# Altium PCB PCB1_TimerCAR.PcbDoc
Units mm, origin at the board's own origin, x right, y up, seen from the top; angles counter-clockwise.
Board outline 42.55 x 34.8 mm, 2 copper layers (Top Layer, Bottom Layer); 27 components, 24 nets, 134 pads, 5 vias.
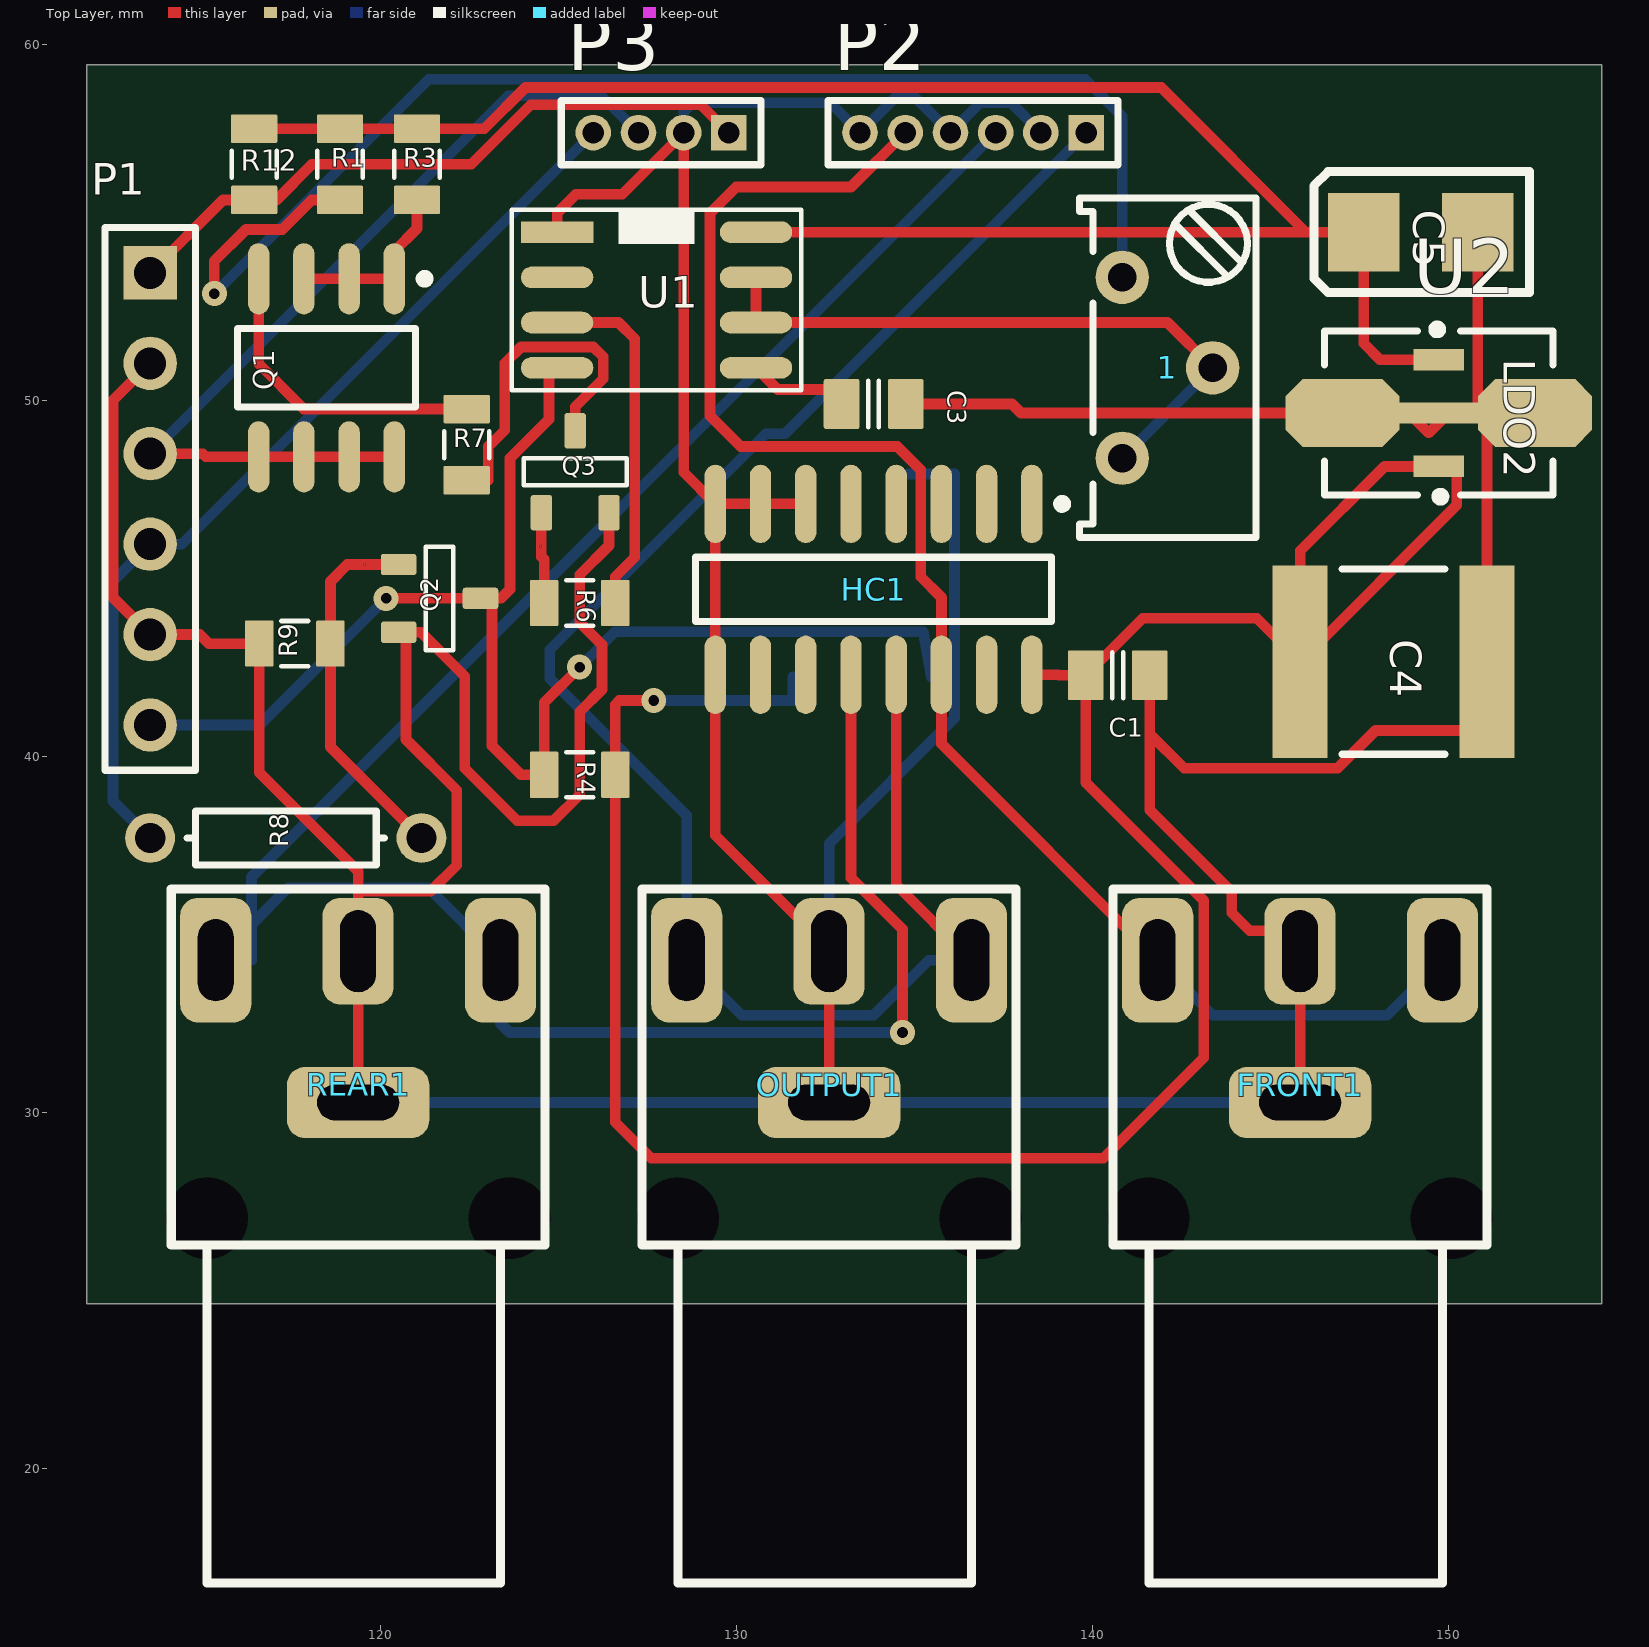
[diagram p0: Top Layer view]
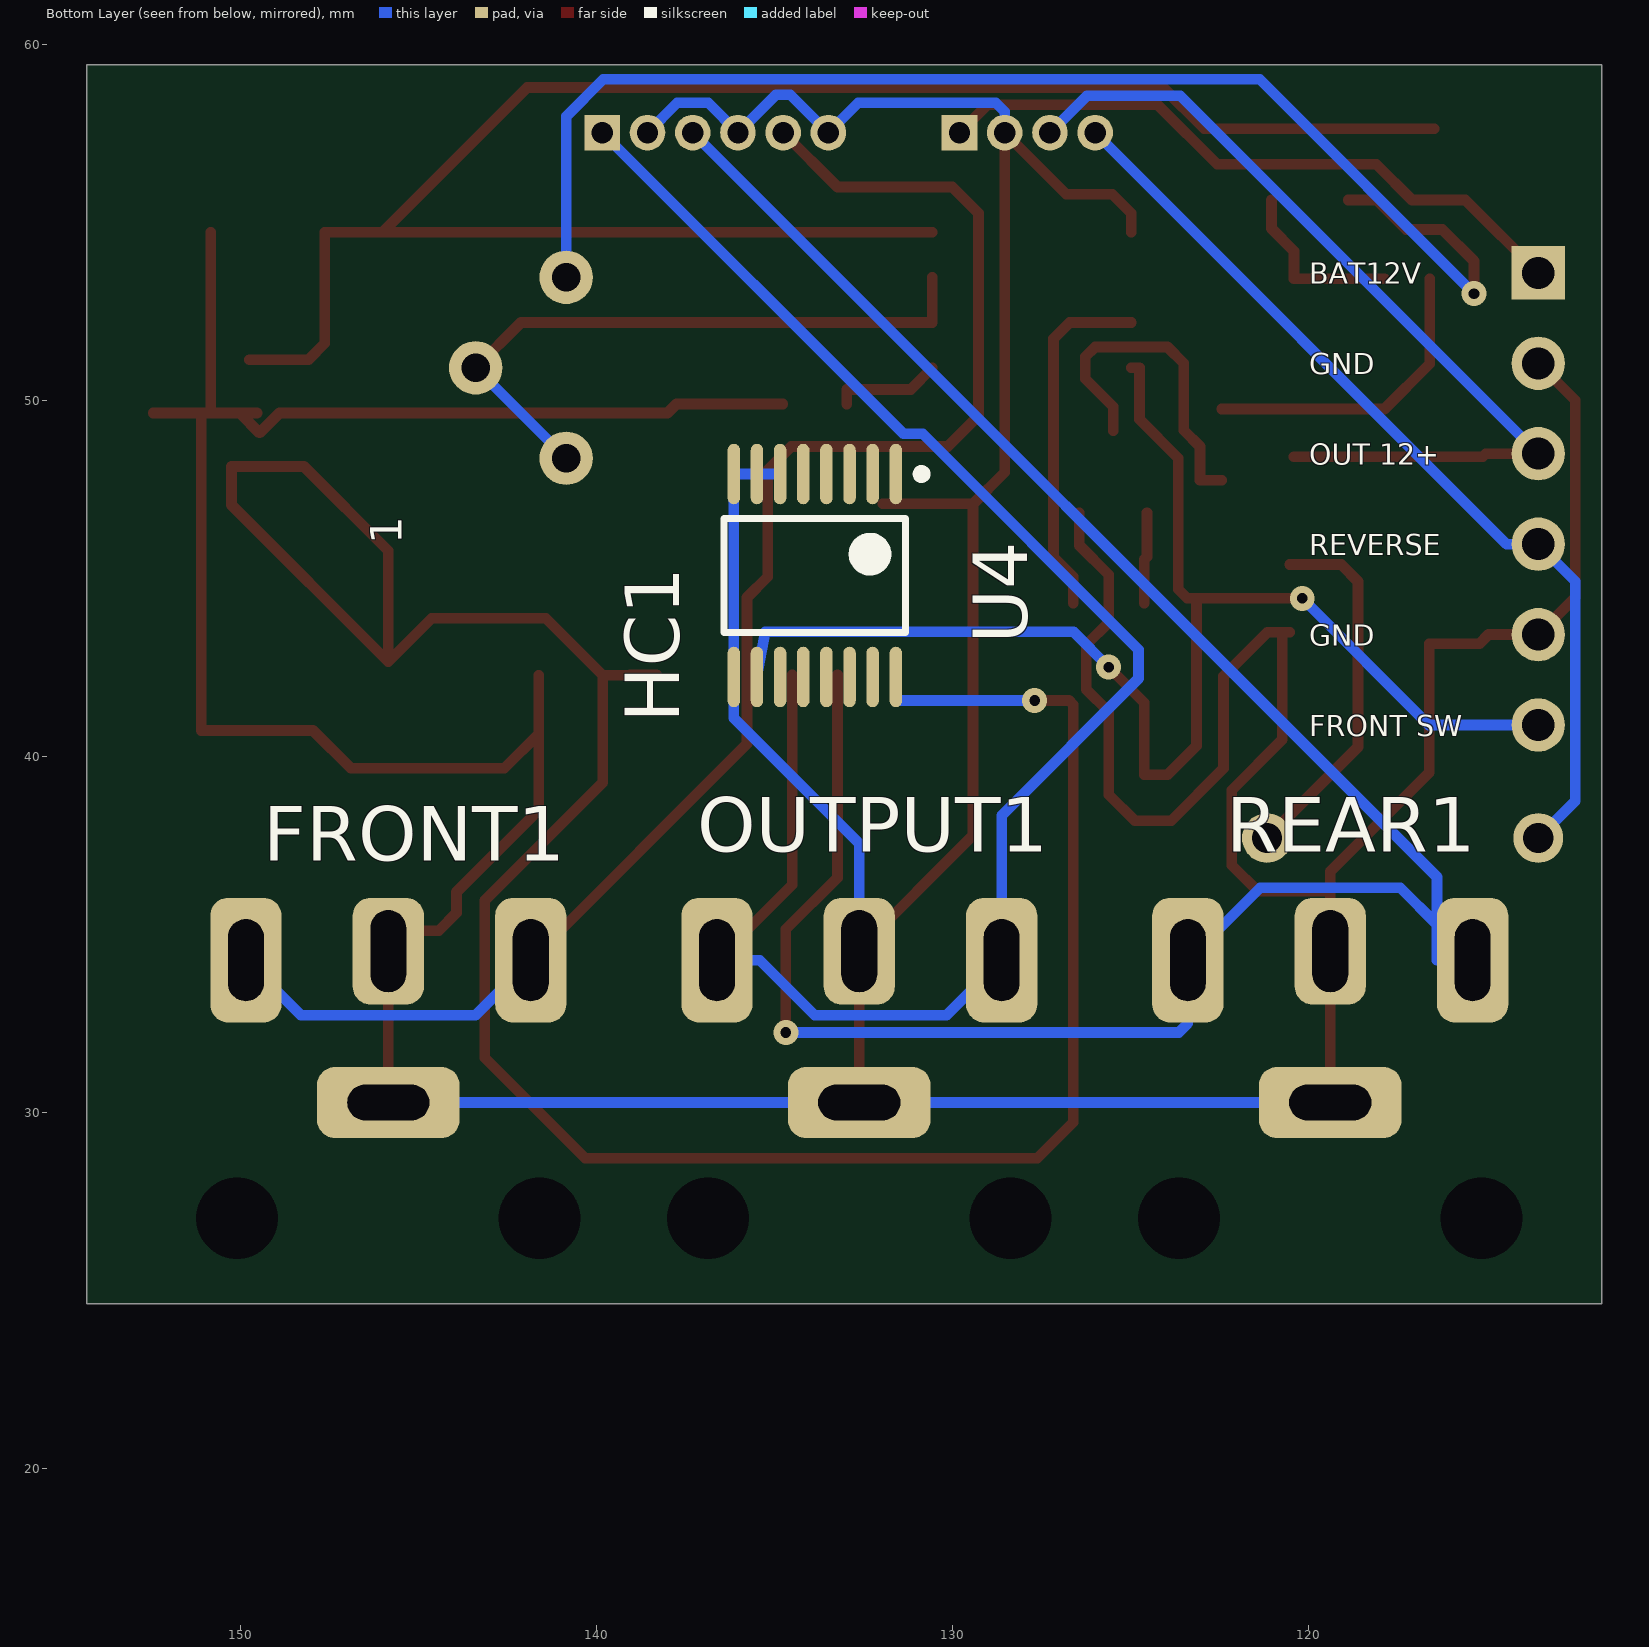
[diagram p1: Bottom Layer view, seen from below]
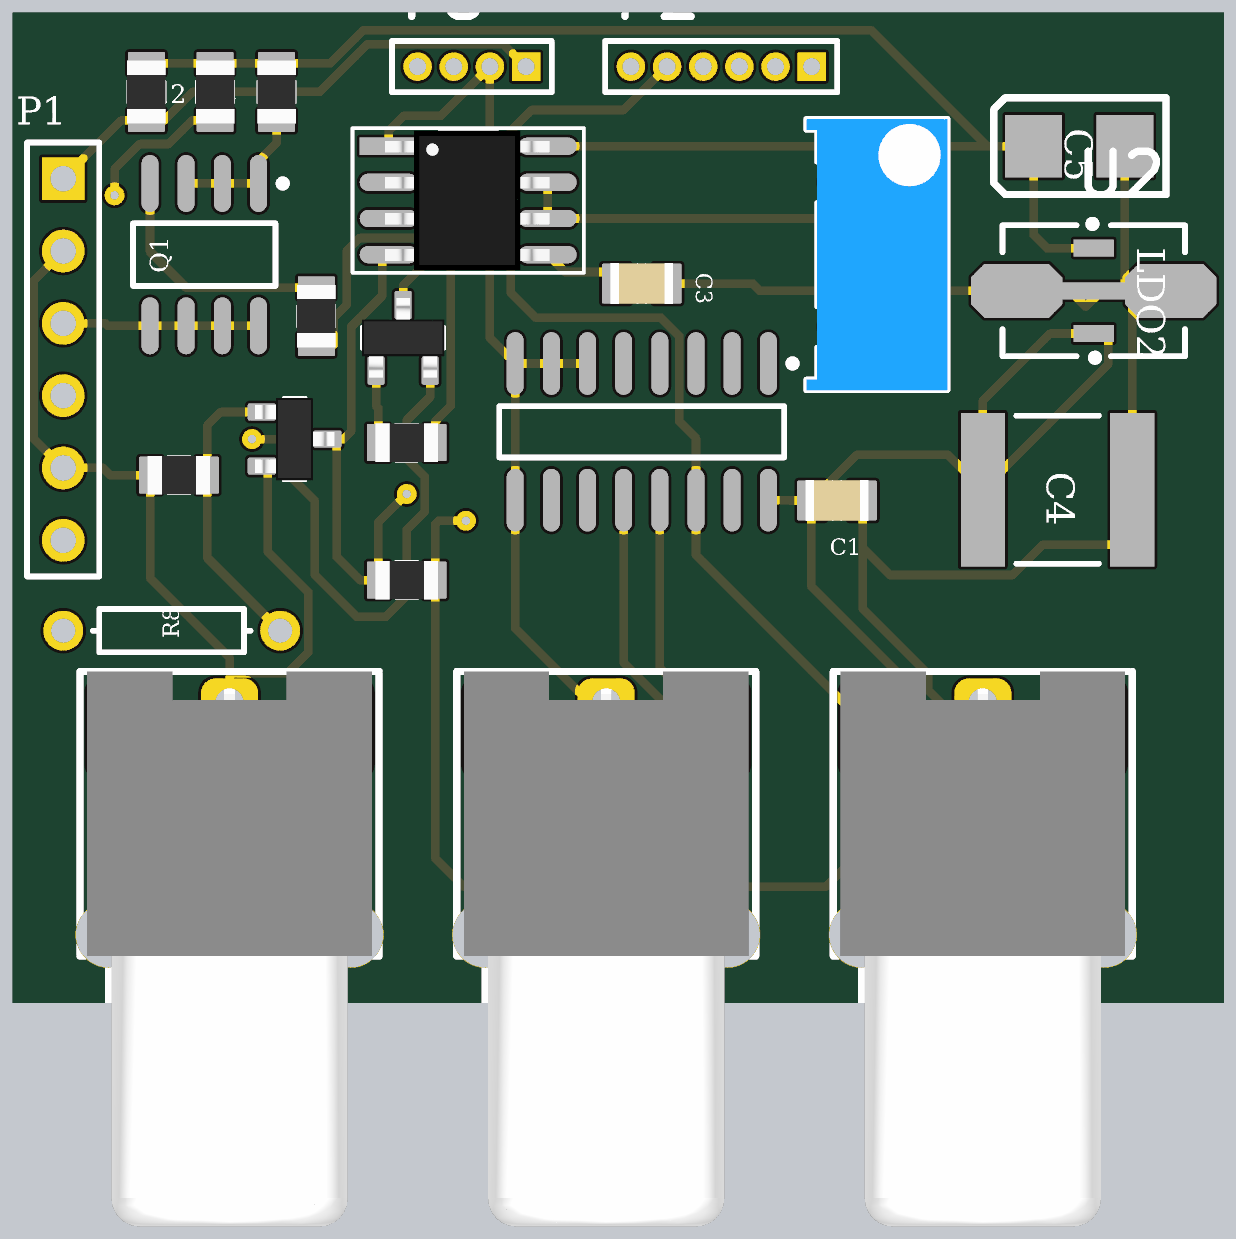
[diagram p2: 3D render of the assembled board from above, using the file's embedded part models]

## Layer stack, top to bottom
Top Solder: solder mask 0.0102, Solder Resist, Dk 3.5
Top Layer: signal copper 0.0356
Dielectric 1: dielectric 0.32, FR-4, Dk 4.8
Bottom Layer: signal copper 0.0356
Bottom Solder: solder mask 0.0102, Solder Resist, Dk 3.5

## Board outline
111.76,24.638 154.305,24.638 154.305,59.436 111.76,59.436

## Design rules (kind name [scope] priority, off if disabled: settings)
Clearance Clearance_polygon [InPolygon] p1: gap=0.3 ignorepadtopadclearanceinfootprint=FALSE except(0: Arc-Hole Track-Hole SMDPad-Hole THPad-Hole Via-Hole Fill-Hole Poly-Hole Region-Hole Text-Hole)
Clearance [All] p2: gap=0.127 ignorepadtopadclearanceinfootprint=FALSE except(0: Arc-Hole Track-Hole SMDPad-Hole THPad-Hole Via-Hole Fill-Hole Poly-Hole Region-Hole Text-Hole)
PolygonConnect [All] p1: connectstyle=Direct reliefconductorwidth=0.254 reliefentries=4 polygonreliefangle="45 Angle" airgapwidth=0.254
RoutingVias [All] p1: holewidth=0.3 width=0.7 viastyle="Through Hole" minholewidth=0.3 minwidth=0.6 maxholewidth=0.5 maxwidth=1
SolderMaskExpansion [All] p1: expansion=0.102
Width Width_Logo [InUnion(1) or InUnion(1048577) or InUnion(3)] p1: maxlimit=2 minlimit=0.001 preferedwidth=0.254
Width Width_Power [InNetClass('Power')] p2: maxlimit=1 minlimit=0.3 preferedwidth=0.5
Width [All] p3: maxlimit=3.048 minlimit=0.254 preferedwidth=0.3
30 further rules are at their usual default settings.

## Components (designator, comment, footprint, x,y, rotation, side; value= is the part's Value field where it differs from the comment)
1 "1M" TRIM_BOURNS_3296Y 142.113,50.927 r270 top
C1 "Cap_0805" CAP_0805 140.716,42.291 r180 top value=100nF
C3 "Cap_0805" CAP_0805 133.858,49.911 r180 top value=10nF
C4 "CAP 47uF 25V 2220(5750)" CAPC2220(5750)230_N 148.463,42.672 r180 top value=47uF
C5 "TAJB106K020R" AVX-CAPC3528_V 149.225,54.737 r0 top
FRONT1 "RCA" RCA 145.838,34.29 r0 top
HC1 "MC74HC4052AD" 751B-05_N 133.858,44.704 r270 top
LDO2 "L78L05ABUTR" SOT-89_N 147.828,49.657 r180 top
OUTPUT1 "RCA" RCA 132.609,34.29 r0 top
P1 "Header 6" HDR1X6 113.538,53.594 r270 top
P2 "VIDEO" MHDR1X6 139.827,57.531 r180 top
P3 "MHDR1X4" MHDR1X4 129.794,57.531 r180 top
Q1 "SI4435DY" SO-8_N 118.491,50.927 r270 top
Q2 "MBT2222" SOT23-3 121.666,44.45 r0 top
Q3 "MBT2222" SOT23-3 125.476,48.006 r90 top
R1 "Res_0805" RES_0805 118.872,56.642 r90 top value=1K
R3 "Res_0805" RES_0805 121.031,56.642 r90 top value=2R
R4 "Res_0805" RES_0805 125.603,39.497 r180 top value=100K
R6 "Res_0805" RES_0805 125.603,44.323 r0 top value=1K
R7 "Res_0805" RES_0805 122.428,48.768 r90 top value=100
R8 "Res_0805" AXIAL-0.3 117.348,37.719 r0 top value=47K
R9 "Res_0805" RES_0805 117.602,43.18 r180 top value=10K
R12 "Res_0805" RES_0805 116.459,56.642 r270 top value=0K
REAR1 "RCA" RCA 119.38,34.29 r0 top
U1 "NE555" SO8 124.968,54.737 r0 top
U2 "L78L05ACUTR" SOT-89_N 151.638,49.657 r0 top
U4 "MC74HC4052DT" 948F-01_N 133.858,45.093 r270 bottom

## Footprints (in the part's own frame and the unit in brackets; to place one, negate y for a bottom-side part, rotate by r counter-clockwise, add the part's x,y. Pads: shape width x height; smd on the part's side, far side on the other; paste and mask are expansions set on the pad)
751B-05_N [mm] "SOIC, 16-Leads, Body 9.9x3.9mm, Pitch 1.27mm, IPC Medium Density"
  oval 2.2x0.6 smd: 1(-2.4,4.445) 2(-2.4,3.175) 3(-2.4,1.905) 4(-2.4,0.635) 5(-2.4,-0.635) 6(-2.4,-1.905) 7(-2.4,-3.175) 8(-2.4,-4.445) 9(2.4,-4.445) 10(2.4,-3.175) 11(2.4,-1.905) 12(2.4,-0.635) 13(2.4,0.635) 14(2.4,1.905) 15(2.4,3.175) 16(2.4,4.445)
  silkscreen extent -2.52,-5 0.9,5.42, body extent -2,-5 2,5, height 1.75
948F-01_N [mm] "TSOP, 16-Leads, Body 5x4.4mm, Pitch 0.65mm, IPC Medium Density"
  oval 1.7x0.35 smd: 1(-2.85,2.275) 2(-2.85,1.625) 3(-2.85,0.975) 4(-2.85,0.325) 5(-2.85,-0.325) 6(-2.85,-0.975) 7(-2.85,-1.625) 8(-2.85,-2.275) 9(2.85,-2.275) 10(2.85,-1.625) 11(2.85,-0.975) 12(2.85,-0.325) 13(2.85,0.325) 14(2.85,0.975) 15(2.85,1.625) 16(2.85,2.275)
  silkscreen extent -2.97,-2.55 1.6,3.12, body extent -2.25,-2.55 2.25,2.55, height 1.2
AVX-CAPC3528_V [mm] "SMT Capacitor, 2 Leads, Body 3.5x2.8mm"
  rect 2x2.2 smd: 1(-1.6,0) 2(1.6,0)
  silkscreen extent -3,-1.7 3.05,1.7, body extent -1.79,-1.54 1.8,1.54, height 1.9
AXIAL-0.3 [mm] "Axial Device, Thru-Hole; 2 Leads; 0.3 in Pin Spacing"
  round 1.4 hole 0.85: 1(-3.81,0) 2(3.81,0)
  silkscreen extent -2.77,-0.76 2.77,0.76
CAP_0805 [mm] "Chip Capacitor, Body 2.0x1.2mm, 0805, IPC Medium Density"
  round 0.254 on Mech14: 0(0,0)
  rrect10% 1x1.4 smd: 1(-0.9,0) 2(0.9,0)
  Top Layer pour cut-out: -0.4,0.8 0.4,0.8 0.4,-0.8 -0.4,-0.8
  silkscreen extent -0.15,-0.65 0.15,0.65, body extent -1.1,-0.72 1.1,0.73, height 1.34
CAPC2220(5750)230_N [mm] "Chip Capacitor, Body 5.7x5.0mm, Height 2.3mm, IPC Medium Density"
  rect 1.55x5.4 smd: 1(-2.625,0) 2(2.625,0)
  silkscreen extent -1.45,-2.6 1.45,2.6, body extent -3.05,-2.7 3.05,2.7, height 2.3
HDR1X6 [mm] "Connector; Header; 6 Position"
  rect 1.5x1.5 hole 0.9: 1(0,0)
  round 1.5 hole 0.9: 2(2.54,0) 3(5.08,0) 4(7.62,0) 5(10.16,0) 6(12.7,0)
  silkscreen extent -1.27,-1.27 13.97,1.27
MHDR1X4 [mm] "Connector; Header; 4 Position"
  rect 1x1 hole 0.6: 1(0,0)
  round 1 hole 0.6: 2(1.27,0) 3(2.54,0) 4(3.81,0)
  silkscreen extent -0.9,-0.9 4.71,0.9
MHDR1X6 [mm] "Connector; Header; 6 Position"
  rect 1x1 hole 0.6: 1(0,0)
  round 1 hole 0.6: 2(1.27,0) 3(2.54,0) 4(3.81,0) 5(5.08,0) 6(6.35,0)
  silkscreen extent -0.9,-0.9 7.25,0.9
RCA [mm]
  round 1.524 hole 2.3: 0(-4.25,-7.25) 0(4.25,-7.25)
  rrect50% 4x2 hole 1 slot 2.3 at 0 deg: 1(0,-4)
  rrect50% 2x3 hole 1 slot 2.3 at 90 deg: 1(0,0.25)
  rrect50% 2x3.5 hole 1 slot 2.3 at 90 deg: 2(-4,0) 3(4,0)
  silkscreen extent -5.25,-17.5 5.25,2, body extent -5,-17.5 5,2, height 12
RES_0805 [mm] "Chip Resistor, Body 2.0x1.2mm, 0805, IPC Medium Density"
  round 0.254 on Mech14: 0(0,0)
  rrect10% 0.8x1.3 smd: 1(-1,0) 2(1,0)
  Top Layer pour cut-out: -0.6,0.75 0.6,0.75 0.6,-0.75 -0.6,-0.75
  silkscreen extent -0.38,-0.64 0.38,0.64, body extent -1.1,-0.67 1.1,0.68, height 0.69
SO8 [mil]
  rect 80x24 smd: 1(0,0)
  oval 80x24 smd: 2(0,-50) 3(0,-100) 4(0,-150) 5(220,-150) 6(220,-100) 7(220,-50) 8(220,0)
  silkscreen extent -50,-175 270,25, body extent -5,-172 222,22, height 57
SO-8_N [mm] "SOIC, 8-Leads, Body 4.9x3.9mm, Pitch 1.27mm, IPC Medium Density"
  oval 2x0.6 smd: 1(-2.5,1.905) 2(-2.5,0.635) 3(-2.5,-0.635) 4(-2.5,-1.905) 5(2.5,-1.905) 6(2.5,-0.635) 7(2.5,0.635) 8(2.5,1.905)
  silkscreen extent -2.62,-2.5 1.1,2.88, body extent -2,-2.5 2,2.5, height 1.75
SOT23-3 [mm] "SOT23, 3 pin"
  round 0.5 on Mech15: 0(0,0)
  rrect25% 1x0.6 smd: 1(-1.15,0.95) 2(-1.15,-0.95) 3(1.15,0)
  silkscreen extent -0.38,-1.45 0.38,1.45, body extent -1.4,-1.45 1.4,1.45, height 1.29
SOT-89_N [mm] "SOT89, 3-Leads, Body 4.5x2.4 mm, Pitch 1.5mm, Lead Span 4.1mm, IPC Medium Density"
  rect 1.4x0.6 smd: 1(-1.9,1.5) 3(-1.9,-1.5)
  rect 1.8x0.6 smd: 2(-1.7,0)
  oct 3.2x1.9 smd: 2(0.8,0)
  silkscreen extent -2.08,-2.3 1.3,2.47, body extent -1.3,-2.3 1.3,2.3, height 1.6
TRIM_BOURNS_3296Y [mm] "Trimming Potentiometer BOURNS 3296Y Series"
  round 1.5 hole 0.8: 1(-2.54,-1.27) 2(0,1.27) 3(2.54,-1.27)
  silkscreen extent -4.76,-2.47 4.76,2.48, body extent -4.76,-2.47 4.77,2.49, height 11.49

## Part data
1: library part TRIM_25T_1M_BOURNS_3296Y-1-105LF, "Trimming Potentiometer", Case=3296Y, Manufacturer=BOURNS, Manufacturer Part Number=3296Y-1-105LF, Power=0.5W, Supplier Part Number 1=3296W-105LF-ND, Tolerance=±10%, Author="CERN DEM JLC", ComponentHeight=11.55mm, Component Type=Standard, CreateDate=20/10/2008, HelpURL=\\cern.ch\dfs\Applications\Altium\Datasheets\TRIM_BOURNS_3296Y.pdf, LatestRevisionDate=28/11/2012, Mounted=Yes, Part Description="25 Turn Trimming Potentiometer (Top Adjustement)", Part Number=TRIM_25T_1M_BOURNS_3296Y-1-105LF, Pin Count=3, SMD=No, Socket=No, Supplier 1=Digi-Key, Supplier 2=TME, Supplier 3=Mouser, Supplier 4=Arrow, Supplier 5=Digi-Key, Supplier 6=Farnell, Supplier 7=Mouser, Supplier 8=Allied, Supplier 9=Farnell, Supplier Part Number 2=3296Y-1-105LF, Supplier Part Number 3=652-3296Y-1-105, Supplier Part Number 4=ggKPwAKS2sB7yfOEZhzQbC3wJOBqSkwgVY0iHxrkrLU, Supplier Part Number 5=3296Y-105LF-ND, Supplier Part Number 6=1141425, Supplier Part Number 7=652-3296Y-1-105LF, Supplier Part Number 8=70154400, Supplier Part Number 9=9353542, Table="Potentiometers THD", TC=±100ppm/°C
C1: "Capacitor", Supplier Part Number 1=80-C0805C104K3R, Supplier 1=Mouser
C3: "Capacitor", Supplier Part Number 1=2280935, Supplier 1=Farnell
C4: library part CMP-1042-00785-1, "CAP 47uF 25V -20% to +80% 2220 (5750 Metric) Thickness 2.2mm SMD", Case-EIA=2220, Case-Metric=5750, Rated Voltage="25 V", Supplier Part Number 1=445-3486-2-ND, Tolerance="-20% to +80%", Max Thickness="2.2 mm", Supplier 1=Digi-Key, Technology=SMT
C5: library part CMP-0279-00001-1, "Capacitor, Tantalum, 10uF 10% 20V MCCT-B (3528)", Capacitance=10uF, Manufacturer=AVX, Rated Voltage=20V, Supplier Part Number 1=197427, Tolerance=10%, ComponentLink1Description="Manufacturer URL", ComponentLink1URL=http://www.avx.com/, ComponentLink2Description=Datasheet, ComponentLink2URL=http://www.avx.com/docs/Catalogs/taj.pdf, DatasheetVersion=Jun-13, Mounting Technology="Surface Mount", PackageDescription="2-Pin SMT Capacitor, 3.5 x 2.8 mm Body", PackageReference=CAPC3528, PartNumber=TAJB106K020R, Polarity=Polarized, Supplier 1=Farnell, Technology=Tantalum
HC1: "Analog Multiplexer/Demultiplexer", Supplier Part Number 1=1201328, Code_IPC=SOIC127P600-16, Code_JEDEC=MS-012-AC, ComponentLink1Description="Manufacturer Link", ComponentLink1URL=http://www.onsemi.com/site/products/parametrics/0,4446,47,00.html, ComponentLink2Description=Datasheet, ComponentLink2URL=http://www.onsemi.com/pub/Collateral/MC74HC4051A-D.PDF, DatasheetVersion=Mar-2000, LatestRevisionDate=13-Apr-2006, LatestRevisionNote="IPC-7351 Footprint Added.", PackageDescription="16-Pin Small Outline Integrated Circuit 1.27 mm Pitch", PackageReference=751B-05, PackageVersion=May-1997, Published=17-Jul-2002, Publisher="Altium Limited", Supplier 1=Farnell
LDO2: "Positive Voltage Regulator, 5V, 4-Pin SOT-89, Tape and Reel", Supplier Part Number 1=31Y2531, ComponentLink1Description="Manufacturer URL", ComponentLink1URL=http://www.st.com, ComponentLink2Description=Datasheet, ComponentLink2URL=http://www.st.com/internet/com/TECHNICAL_RESOURCES/TECHNICAL_LITERATURE/DATASHEET/CD00000446.pdf, DatasheetVersion=Feb-2011, PackageDescription="3-Pin SOT-89 Package 1.5 mm Pitch, 4.1 mm Lead Span", PackageReference=SOT-89, PackageVersion=2011, PartNumber=L78L05ABUTR, Supplier 1=Newark
P1: "Header, 6-Pin", LatestRevisionDate=17-Jul-2002, LatestRevisionNote="Re-released for DXP Platform.", Publisher="Altium Limited"
P2: library part MHDR1X6, "Header, 6-Pin", LatestRevisionDate=17-Jul-2002, LatestRevisionNote="Re-released for DXP Platform.", Publisher="Altium Limited"
P3: "Header, 4-Pin", LatestRevisionDate=17-Jul-2002, LatestRevisionNote="Re-released for DXP Platform.", Publisher="Altium Limited"
Q1: "P-Channel 30V (D-S) Rated  MOSFET", Supplier Part Number 1=942-SI4435DYPBF, ComponentLink1Description="Manufacturer Link", ComponentLink1URL=http://www.vishay.com/, ComponentLink2Description=Datasheet, ComponentLink2URL=http://www.vishay.com/docs/70149/70149.pdf, DatasheetVersion=6-Oct-1997, LatestRevisionDate=13-Apr-2006, LatestRevisionNote="IPC-7351 Footprint Added.", PackageDescription="8-Pin Small Outline Integrated Circuit 1.27 mm Pitch", PackageReference=SO-8, PackageVersion=Aug-1998, Published=8-Jun-2000, Publisher="Altium Limited", Supplier 1=Mouser
Q2 Q3: library part NPN_MMBT2222A, "Transistor SMD NPN 40V 600mA 250mW SOT23-3", Manufacturer 1="Fairchild Semiconductor", Manufacturer 2="NXP Semiconductors", Manufacturer Part Number 1=MMBT2222A, Package / Case=SOT-23, Ratings="40V; 600mA; 250mW", Supplier Part Number 1=MMBT2222AFSTR-ND, Manufacturer Part Number 2=MMBT2222A, Material=Si, Mounting Type="Surface Mount", SCDType=source, Supplier 1=Digi-Key, Supplier 2=Digi-Key, Supplier Part Number 2=568-4509-2-ND
R1 R4: "Resistor", Supplier Part Number 1=70154698, Supplier 1=Allied
R3: "Resistor"
R6: "Resistor", Supplier Part Number 1=70484573, Supplier 1=Allied
R7: "Resistor", Supplier Part Number 1=58K4710, Supplier 1=Newark
R8: "Resistor", Supplier Part Number 1=70265297, Supplier 1=Allied
R9: "Resistor", Supplier Part Number 1=70264867, Supplier 1=Allied
R12: "Resistor", Supplier Part Number 1=71-CRCW0805-0-E3, Supplier 1=Mouser
U1: "TIMER IC", Current=200mA, Frequency=500kHz, Manufacturer=STMicroelectronics, Manufacturer Part Number=NE555DT, Operating Temperature="0°C ~ 70°C", Package / Case="8-SOIC (3.9mm Width)", Supplier Part Number=497-1962-2-ND, Voltage - Supply="4.5 V ~ 16 V", Category="Integrated Circuits (ICs)", Count=-, Packaging="Tape & Reel (TR)", RoHS="RoHS Compliant", Supplier=Digi-Key, Supplier 1=Digi-Key, Supplier Part Number 1=497-1962-2-ND, Type="555 Type, Timer/Oscillator (Single)"
U2: "Positive Voltage Regulator, 5V, 4-Pin SOT-89, Tape and Reel", ComponentLink1Description="Manufacturer URL", ComponentLink1URL=http://www.st.com, ComponentLink2Description=Datasheet, ComponentLink2URL=http://www.st.com/internet/com/TECHNICAL_RESOURCES/TECHNICAL_LITERATURE/DATASHEET/CD00000446.pdf, DatasheetVersion=Feb-2011, PackageDescription="3-Pin SOT-89 Package 1.5 mm Pitch, 4.1 mm Lead Span", PackageReference=SOT-89, PackageVersion=2011, PartNumber=L78L05ACUTR
U4: "Dual 4-Channel Analog Multiplexer/Demultiplexer", Supplier Part Number 1=70466412, ComponentLink1Description="Manufacturer Link", ComponentLink1URL=http://www.onsemi.com/, ComponentLink2Description=Datasheet, ComponentLink2URL=http://www.onsemi.com/pub/Collateral/MC74HC4051-D.PDF, DatasheetVersion=1995, LatestRevisionDate=12-Dec-2006, LatestRevisionNote="IPC-7351 Footprint Added.", PackageDescription="16-Pin Thin Small Outline Package 0.65 mm Pitch", PackageReference=948F-01, PackageVersion=Feb-2000, Published=15-Apr-2002, Publisher="Altium Limited", Supplier 1=Allied

## Via types
v1: diameter 0.7, hole 0.3, Top Layer to Bottom Layer, 5 vias

## Nets (pads, with @x,y where several pads share a name; then routed paths per layer and width w, separated by ;. In a path a pad name is that pad's centre, name@x,y a point inside that pad or via, vN(x,y) a via of type N, cw(c..) or ccw(c..) an arc to the next point about the centre after c; other vN are vias at no path point)
12V: C5.1 LDO2.3 R1.2 R3.2 R12.1 U1.8 U2.1 | length 54.2
  Top Layer w0.3: R12.1 R1.2 R3.2 122.92,57.642 124.079,58.801 141.935,58.801 145.999,54.737 ; U1.8 145.999,54.737 ; U2.1 LDO2.3 148.081,51.157 147.625,51.613 C5.1 145.999,54.737
BAT12V: P1.1 P3.1 R12.2 | length 18.5
  Top Layer w0.3: P1.1 115.586,55.642 R12.2 117.085,55.642 118.085,56.642 122.555,56.642 124.231,58.318 129.007,58.318 P3.1
CAMERA+12V: P1.3 P3.3 Q1.5 Q1.6 Q1.7 Q1.8 | length 25.2
  Top Layer w0.3: P1.3 115.011,48.514 115.098,48.427 Q1.5 Q1.6 Q1.7 Q1.8
  Bottom Layer w0.3: P1.3 123.596,58.572 126.213,58.572 P3.3
FROM_REVERSE: P1.4 P3.4 R8.1 | length 26.4
  Bottom Layer w0.3: R8.1 112.497,38.76 112.497,44.933 P1.4 114.427,45.974 P3.4
FRONT_AV: FRONT1.2 FRONT1.3 HC1.14 P2.5 | length 44.5
  Top Layer w0.3: P2.5 133.223,56.007 129.997,56.007 129.261,55.27 129.261,49.581 130.124,48.717 134.518,48.717 135.179,48.057 135.179,45.06 135.763,44.475 HC1.14 135.763,40.365 FRONT1.2
  Bottom Layer w0.3: FRONT1.2 143.387,32.741 148.289,32.741 FRONT1.3
FRONT_SW: P1.6 Q2.3 R4.2 U1.4 U4.10 | length 39.3
  Top Layer w0.3: v1(120.167,44.45) Q2.3 Q2.3@123.14,44.45 ; U1.4 124.739,50.927 124.739,49.479 123.647,48.387 123.647,44.704 123.393,44.45 Q2.3@123.14,44.45 ; v1(125.603,42.52) 124.603,41.52 R4.2 123.952,39.497 123.14,40.309 Q2.3@123.14,44.45
  Bottom Layer w0.3: P1.6 116.611,40.894 v1(120.167,44.45) ; v1(125.603,42.52) 126.594,43.51 135.254,43.51 U4.10
GND: C1.1 C3.1 C4.1 C5.2 FRONT1.1 HC1.6 HC1.7 HC1.8 HC1.9 LDO2.2 OUTPUT1.1 P1.2 P1.5 P2.2 P2.4 P2.6 P3.2 Q2.2 Q3.2 R9.2 REAR1.1 U1.1 U2.2 U4.6 U4.7 U4.8 U4.9 | length 203.2
  Top Layer w0.3: P1.2 112.497,50.013 112.497,44.475 P1.5 114.935,43.434 115.189,43.18 R9.2 116.602,39.557 119.38,36.779 119.38,36.22 ; REAR1.1@119.38,30.29 119.38,34.54 119.38,36.22 ; Q2.2 Q2.2@120.726,43.5 ; U1.1 124.968,55.27 125.501,55.804 126.797,55.804 P3.2 128.524,47.993 HC1.8 ; Q3.2 126.426,45.933 125.603,45.11 125.603,43.774 126.23,43.147 126.23,41.893 125.603,41.266 125.603,38.938 124.866,38.202 123.85,38.202 122.377,39.675 122.377,42.266 121.143,43.5 Q2.2@120.726,43.5 ; HC1.6 HC1.7 HC1.8 ; OUTPUT1.1@132.609,30.29 132.609,34.54 132.609,34.599 129.413,37.795 HC1.9 HC1.8 ; C3.1 137.744,49.911 137.998,49.657 147.028,49.657 148.895,49.657 149.454,49.098 U2.2@150.012,49.657 ; C1.1 141.616,40.64 ; FRONT1.1@145.838,30.29 145.838,34.54 145.838,35.114 144.424,35.114 143.921,35.617 143.921,36.203 141.616,38.508 141.616,40.64 ; U2.2@149.528,49.657 149.938,49.657 U2.2@150.012,49.657 ; C5.2 U2.2@150.825,49.657 ; U2.2@152.438,49.657 U2.2@151.088,49.657 ; 119.38,36.22 121.412,36.22 122.149,36.957 122.149,39.065 120.726,40.488 Q2.2@120.726,43.5 ; 141.616,40.64 142.581,39.675 146.888,39.675 147.955,40.742 151.088,40.742 C4.1 U2.2@151.088,49.657 ; U2.2@150.012,49.657 U2.2@150.825,49.657 ; U2.2@150.825,49.657 U2.2@151.088,49.657
  Bottom Layer w0.3: REAR1.1@119.38,30.29 132.609,30.29 FRONT1.1@145.838,30.29 ; P3.2 128.524,58.115 128.778,58.369 132.639,58.369 P2.6 134.544,58.598 134.95,58.598 P2.4 136.855,58.369 137.719,58.369 P2.2 ; OUTPUT1.1@132.609,34.54 132.609,37.567 136.133,41.091 U4.9 U4.8 U4.7 U4.6
Net1_1: 1.1 R1.1 | length 38.1
  Top Layer w0.3: v1(115.341,53.01) 115.341,53.924 116.23,54.813 117.246,54.813 118.075,55.642 R1.1
  Bottom Layer w0.3: v1(115.341,53.01) 121.361,59.03 139.802,59.03 140.843,57.988 1.1
Net1_2: 1.2 1.3 U1.6 U1.7 | length 18.2
  Top Layer w0.3: U1.7 U1.6 142.113,52.197 1.2
  Bottom Layer w0.3: 1.3 1.2
NetC3_2: C3.2 U1.5 | length 3.1
  Top Layer w0.3: U1.5 131.166,50.317 132.958,50.317 C3.2
NetHC1_10: HC1.10
NetLD1_1: 
NetQ1_1: Q1.1 Q1.2 Q1.3 R3.1 | length 5
  Top Layer w0.3: Q1.3 Q1.2 Q1.1 120.396,54.204 121.031,54.839 R3.1
NetQ1_4: Q1.4 R7.2 | length 8.8
  Top Layer w0.3: Q1.4 116.586,51.038 117.856,49.768 R7.2
NetQ2_1: Q2.1 R8.2 R9.1 | length 10.4
  Top Layer w0.3: Q2.1 119.075,45.4 118.602,44.927 R9.1 118.602,40.275 R8.2
NetQ3_1: Q3.1 R6.1 | length 2.6
  Top Layer w0.3: Q3.1 124.526,45.619 124.603,45.542 R6.1
NetQ3_3: Q3.3 R7.1 | length 9.6
  Top Layer w0.3: R7.1 123.038,47.768 123.038,48.717 123.495,49.174 123.495,51.054 123.952,51.511 125.984,51.511 126.261,51.234 126.261,50.62 125.476,49.835 Q3.3
NetR6_2: R6.2 U1.3 | length 10
  Top Layer w0.3: U1.3 126.695,52.197 127.152,51.74 127.152,45.609 126.603,45.06 R6.2
NetR10_2: U1.2
REAR_AV: HC1.12 P2.3 REAR1.2 REAR1.3 | length 66.4
  Top Layer w0.3: HC1.12 133.223,36.601 134.671,35.154 v1(134.671,32.258)
  Bottom Layer w0.3: v1(134.671,32.258) 123.634,32.258 123.38,32.512 REAR1.3 121.348,36.322 117.412,36.322 116.383,35.293 ; P2.3 116.383,36.627 116.383,35.293 ; 116.383,35.293 116.383,34.29 REAR1.2 116.383,35.293
V2_Y0: HC1.1
V2_Y1: HC1.5
VCC: C1.2 C4.2 HC1.16 LDO2.1 R4.1 U2.3 U4.16 | length 72.2
  Top Layer w0.3: v1(127.682,41.58) 126.717,41.58 126.603,41.466 R4.1 126.603,29.734 127.61,28.727 140.31,28.727 143.129,31.547 143.129,35.966 139.816,39.279 C1.2 ; HC1.16 139.04,42.304 139.053,42.291 C1.2 ; LDO2.1 148.208,48.157 145.838,45.787 C4.2 ; U2.3 150.241,48.157 150.241,47.075 C4.2 ; C1.2 141.416,43.891 144.619,43.891 C4.2
  Bottom Layer w0.3: v1(127.682,41.58) 131.583,41.58 U4.16
VIDEO_OUT1: HC1.13 OUTPUT1.2 OUTPUT1.3 P2.1 | length 49.6
  Top Layer w0.3: HC1.13 134.493,36.406 OUTPUT1.3
  Bottom Layer w0.3: OUTPUT1.3 135.407,34.29 133.858,32.741 130.158,32.741 OUTPUT1.2 128.609,38.354 124.765,42.198 124.765,43.011 130.827,49.073 131.369,49.073 P2.1
pads on no net: C1.0 C3.0 FRONT1.0 HC1.2 HC1.3 HC1.4 HC1.11 HC1.15 OUTPUT1.0 Q2.0 Q3.0 R1.0 R3.0 R4.0 R6.0 R7.0 R9.0 R12.0 REAR1.0 U4.1 U4.2 U4.3 U4.4 U4.5 U4.11 U4.12 U4.13 U4.14 U4.15

## Silkscreen, mask and mechanical layers (free items; w line width, h text height)
Bottom Overlay:
  text "BAT12V" at 119.972,53.086 h1
  text "GND" at 119.972,50.555 h1
  text "OUT 12+" at 119.972,48.013 h1
  text "REVERSE" at 119.972,45.471 h1
  text "GND" at 119.972,42.928 h1
  text "FRONT SW" at 119.972,40.386 h1
Mechanical 6:
  the board outline again, w0.254